# EAGLE board 4056 (EAGLE 8.7.1)
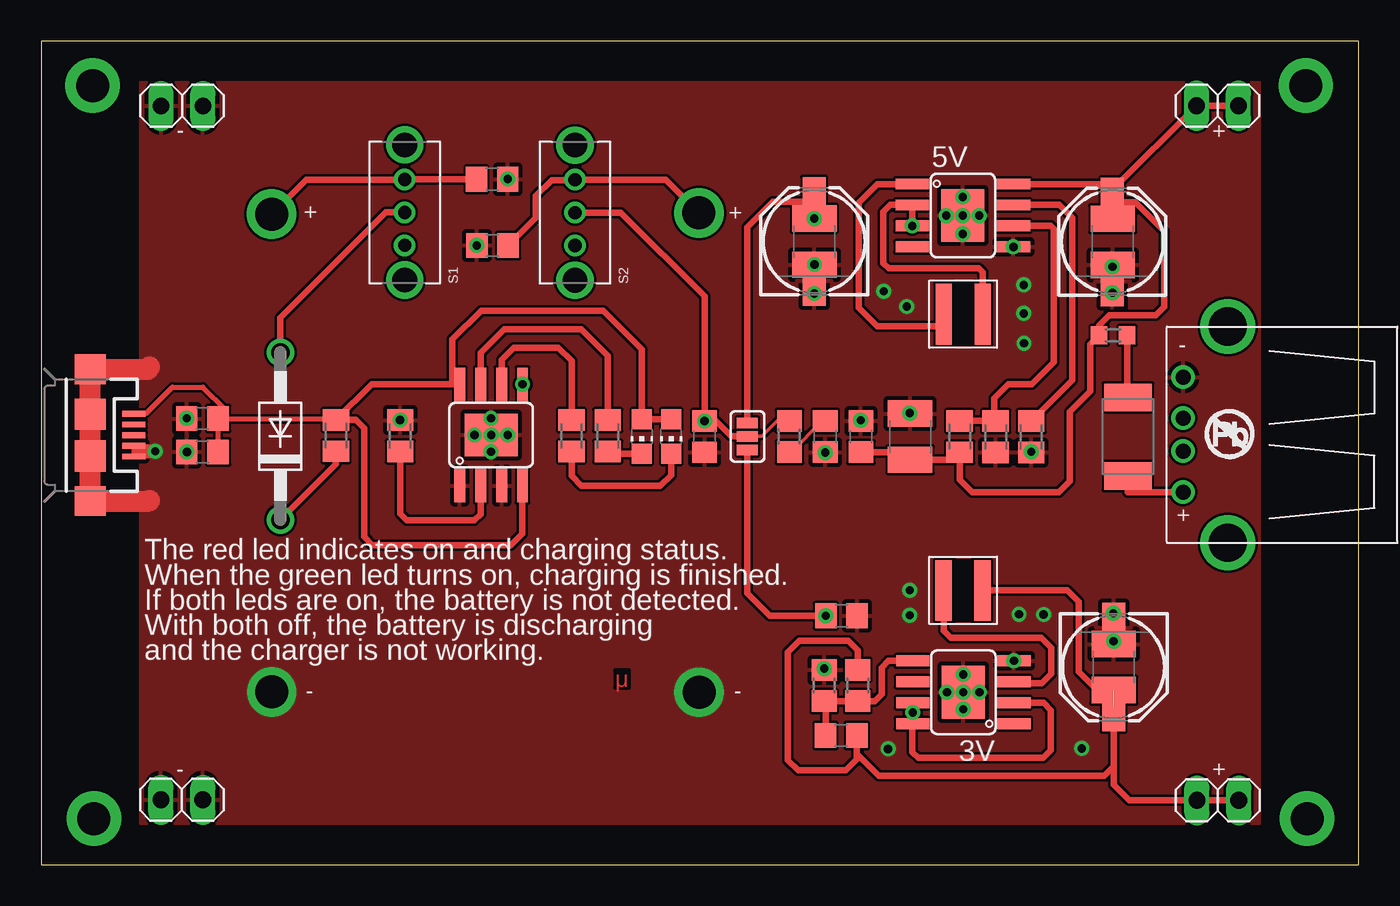
[diagram p0: board, top side]
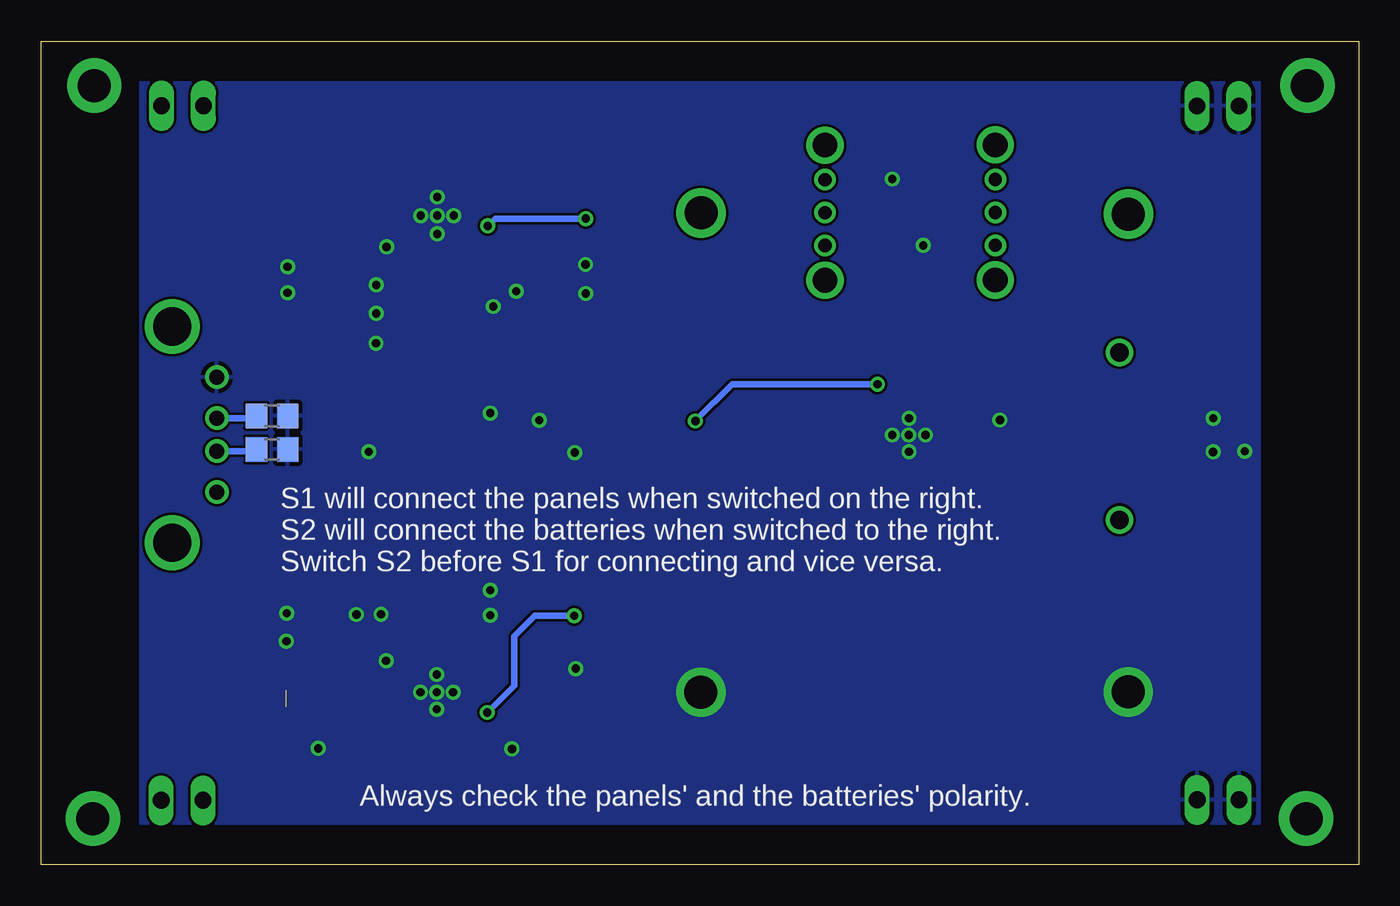
[diagram p1: board, bottom side, seen from below]

Size 80 x 50 mm. Coordinates in mm from the lower left corner, seen from the top.
Outline: 0,0 80,0 80,50 0,50 0,0
Copper layers (1*16): Top 0.035mm / dielectric 1.5mm / Bottom 0.035mm
Design rules "default": minimum track width 6mil, minimum drill 0.35mm, track to track 6mil, track to pad 6mil, pad to pad 6mil, via to via 6mil, smd to smd 6mil, copper to edge 40mil, drill to drill 6mil, minimum pad ring 10mil, minimum via ring 8mil, stop-mask expansion 4mil, vias tented up to drill 0mil, thermal gap 10mil

## Footprints (pad centres in the part's own frame; a part is rotated, then mirrored left to right if it is on the bottom)
SO8_EP = smd 0.66 x 2.032: EN -0.635,3.073; FB 1.905,3.073; GND1 1.905,-3.073; IN -0.635,-3.073; LX 0.635,-3.073; NC -1.905,-3.073; NC1 0.635,3.073; PG -1.905,3.073 | smd 3.2 x 2.6: GND 0,0
SOP-8LEP = smd 0.66 x 2.032: 1 -1.905,-3.073; 2 -0.635,-3.073; 3 0.635,-3.073; 4 1.905,-3.073; 5 1.905,3.073; 6 0.635,3.073; 7 -0.635,3.073; 8 -1.905,3.073 | smd 3.2 x 2.6: 9 0,0
C0805 = smd 1.3 x 1.5: 1 -0.95,0; 2 0.95,0
C1210 = smd 1.6 x 2.7: 1 -1.4,0; 2 1.4,0
PANASONIC_D = smd 3 x 1.4: + 2.4,0; - -2.4,0
DO41-10 = drill 1.118: A 5.08,0; C -5.08,0
R0603 = smd 1 x 1.1: 1 -0.85,0; 2 0.85,0
1812 = smd 1.676 x 2.896: 1 -2.388,0; 2 2.388,0
1X02 = drill 1.016 long: 1 -1.27,0; 2 1.27,0
1X01_2MM = drill 2 pad 3.302: 1 0,0
USB-MICROB = smd 1.4 x 0.35: D+ -2.65,0; D- -2.65,-0.65; GND -2.65,1.3; ID -2.65,0.65; VBUS -2.65,-1.3 | smd 1.9 x 1.8: MT1 0,-4; MT2 0,4 | smd 1.9 x 1.9: P$1 0,-1.27; P$2 0,1.27
SMT-JUMPER_3_NO_SILK = smd 0.635 x 1.27: 1 -0.813,0; 2 0,0; 3 0.813,0
WE-MAPI_40XX = smd 0.98 x 3.7: 1 -1.185,0; 2 1.185,0
CHIP-LED0805 = smd 1.2 x 1.2: A 0,-1.05; C 0,1.05
R0805 = smd 1.3 x 1.5: 1 -0.95,0; 2 0.95,0
M0805 = smd 1.3 x 1.6: 1 -0.95,0; 2 0.95,0
SW2MM = drill 0.8: 1 -2,0; 2 0,0; 3 2,0 | drill 1.5 pad 1.676: P$1 -4.1,0; P$2 4.1,0
ESOP8 = smd 0.66 x 2.032: 1 -1.905,-3.073; 2 -0.635,-3.073; 3 0.635,-3.073; 4 1.905,-3.073; 5 1.905,3.073; 6 0.635,3.073; 7 -0.635,3.073; 8 -1.905,3.073 | smd 3.2 x 2.6: 9 0,0
USB-A-H = drill 0.914: D+ 2.718,-1.003; D- 2.718,1.003; GND 2.718,-3.493; VBUS 2.718,3.493 | drill 2.311: P$5 0,-6.566; P$6 0,6.566

## Placement (x,y rotation side)
3V  SY8083P  [SO8_EP]  55.99,10.47 90 top
5V  FP6276A  [SOP-8LEP]  55.96,39.42 270 top
C1  [C0805]  9.79,27.09 180 top
C2  [C0805]  40.28,25.99 270 top
C3  [C0805]  9.79,25.06 180 top
C4  [C1210]  52.76,25.99 90 top
C5  [C0805]  49.77,26 270 top
C6  [C0805]  48.57,7.85 180 top
C7  [C1210]  65.12,12 90 top
C8  4.7-10u  [C0805]  48.59,15.11 0 top
C9  47uF  [PANASONIC_D]  65.11,12 270 top
C10  47uF  [PANASONIC_D]  65.04,37.82 90 top
C11  47uF  [PANASONIC_D]  46.93,37.84 90 top
C12  [C1210]  65.06,37.82 270 top
C13  [C1210]  46.94,37.83 270 top
C14  100  [C0805]  27.38,41.62 0 top
C15  22n  [C0805]  47.6,26 270 top
C16  100  [C0805]  27.4,37.6 180 top
DIN  SB120  [DO41-10]  14.52,26.02 90 top
F  [R0603]  65.08,32.14 180 top
F1  16V/2.5A(5A TRIP)  [1812]  65.99,25.99 270 top
GND  [1X02]  8.55,46.07 0 top
J1  [1X01_2MM]  76.86,2.8 0 top
J2  [1X01_2MM]  76.78,47.3 0 top
J3  [1X01_2MM]  3.2,2.8 0 top
J4  [1X01_2MM]  3.12,47.3 0 top
J5  [USB-MICROB]  2.98,26.08 180 top
JP1  [1X02]  71.44,3.91 0 top
JP2  [1X02]  8.54,3.94 0 top
JP3  JUMPER-SMT_3_NO_SILK  [SMT-JUMPER_3_NO_SILK]  42.88,26 270 top
L1  2.2u  [WE-MAPI_40XX]  55.98,33.43 180 top
L4  2.2u  [WE-MAPI_40XX]  55.97,16.65 0 top
LED1  [CHIP-LED0805]  36.47,26 180 top
LED2  [CHIP-LED0805]  38.25,26 180 top
PLACEHOLDER2  [1X02]  71.42,46.08 0 top
R1  (549)-560  [R0805]  49.58,10.88 90 top
R2  121-(124)  [R0805]  47.55,10.88 270 top
R3  [R0805]  65.98,27.25 180 bottom
R4  4k  [M0805]  21.8,26.04 270 top
R5  2k  [M0805]  34.4,26.04 90 top
R6  2k  [M0805]  32.2,26.04 90 top
R7  0  [M0805]  17.9,26.05 270 top
R8  330k  [M0805]  60.11,25.98 270 top
R9  560  [M0805]  55.76,25.99 90 top
R10  75  [M0805]  57.95,25.98 270 top
R11  [R0805]  65.98,25.21 180 bottom
R12  0  [R0805]  45.43,26 90 top
S1  SWITCH  [SW2MM]  22.07,39.6 90 top
S2  SWITCH  [SW2MM]  32.41,39.59 90 top
SOLAR  4056  [ESOP8]  27.32,26.09 0 top
U$1  [NO_PB_LOGO_0.120]  70.43,24.25 0 top
X1  USB-A-H  [USB-A-H]  72.05,26.11 180 top

## Library data of the parts
3V = microcodes; SOIC8: soic8_ep
5V S1 S2 SOLAR = microcodes
C1-C8 C12-C16 = rcl; SPICEPREFIX: C
C9-C11 = SparkFun-Capacitors; PROD_ID: CAP-08478
DIN = diode
F R1-R12 = rcl; SPICEPREFIX: R
F1 = SparkFun-Fuses; PROD_ID: RES-14390
GND JP1 JP2 PLACEHOLDER2 = pinhead
J1-J4 = SparkFun-Connectors
J5 = SparkFun-Connectors; PROD_ID: CONN-09505; SF_ID: PRT-08533
JP3 = SparkFun-Jumpers
L1 L4 = PowerMagnetics (rev18e); WE-NUMBER: 74438356022/2,2uH
LED1 LED2 = led
U$1 = SparkFun-Aesthetics
X1 = con-usb

## Nets
2FB: 3V.FB C6.2 R1.1 R2.2
BAT: C2.1 JP3.2 R12.2 S2.2 SOLAR.5
BAT3: 3V.EN 3V.IN 3V.PG C8.1 JP3.3
BAT5: 5V.2 5V.3 C11.+ C13.1 JP3.1 L1.1
BH: C16.1 S2.3
CHRG: R5.2 SOLAR.7
CLED: LED1.C R5.1
DIN: DIN.A S1.2
DM: R11.2 X1.D-
DP: R3.2 X1.D+
FB5: 5V.6 R9.2 R10.1
GND: 3V.GND 3V.GND1 5V.5 5V.9 C1.2 C2.2 C3.2 C4.2 C5.1 C7.2 C8.2 C9.- C10.- C11.- C12.2 C13.2 C14.2 C15.2 C16.2 GND.1 GND.2 J5.GND J5.ID J5.MT1 J5.MT2 J5.P$1 J5.P$2 JP2.1 JP2.2 R2.1 R3.1 R4.1 R8.2 R10.2 R11.1 SOLAR.1 SOLAR.3 SOLAR.9 X1.GND
HOLD: C15.1 R12.1
LX: 3V.LX L4.1
LX5: 5V.1 L1.2
N$2: S2.1
N$4: S1.1
NC: 5V.4
OVC: 5V.7 R8.1
PNL: C14.1 S1.3
PROG: R4.2 SOLAR.2
SDDD: DIN.C R7.2
SIN: C1.1 C3.1 J5.VBUS LED1.A LED2.A R7.1 SOLAR.4 SOLAR.8
SLED: LED2.C R6.1
STB: R6.2 SOLAR.6
VFF: F1.1 F.1
VOUT5: 5V.8 C4.1 C5.2 C10.+ C12.1 F.2 PLACEHOLDER2.1 PLACEHOLDER2.2 R9.1
VOUT33: C6.1 C7.1 C9.+ JP1.1 JP1.2 L4.2 R1.2
VUSB: F1.2 X1.VBUS

## Tracks (layer width: path | path; a pad name or v marks a point on that pad's centre or on a via)
2FB
  Top 0.406: C6.2 47.62,9.86 R2.2 R1.1 50.6,9.93 51.02,10.35 51.02,11.97 51.42,12.38 3V.FB
BAT  (via drill 0.5)
  Top 0.203: JP3.2 43.74,26 44.69,26.95 R12.2
  Top 0.406: JP3.2 41.9,26 40.96,26.94 C2.1 40.28,34.51 35.2,39.59 S2.2
  Bottom 0.406: SOLAR.5 38.06,29.16 C2.1
  other vias: 29.23,29.16 40.28,26.94
BAT3  (via drill 0.5)
  Top 0.406: 3V.IN 60.87,9.84 61.31,9.39 61.31,6.95 60.85,6.49 53.25,6.49 52.9,6.84 52.9,8.27 | 52.9,8.27 52.9,8.55 3V.PG | 3V.EN v52.92,9.24 52.92,8.29 52.9,8.27 | JP3.3 42.88,16.48 44.25,15.11 C8.1
  Bottom 0.406: v52.92,9.24 51.29,10.87 51.29,13.86 50.04,15.11 C8.1
  other vias: 47.64,15.11
BAT5  (via drill 0.5)
  Top 0.406: JP3.1 42.88,38.71 44.41,40.24 C11.+ C13.1 | L1.1 57.16,35.97 56.93,36.2 51.46,36.2 51.13,36.53 51.13,39.64 51.55,40.05 5V.2 v52.89,38.78
  Bottom 0.406: C13.1 52.44,39.23 v52.89,38.78
  other vias: 46.94,39.23
BH  (via drill 2)
  Top 0.406: v39.93,39.57 37.91,41.59 S2.3 32.39,41.57 30.99,41.57 30.03,40.61 30.03,39.28 C16.1
CHRG
  Top 0.406: R5.2 34.4,30.9 32.8,32.5 28.1,32.5 26.68,31.09 SOLAR.7
CLED
  Top 0.406: R5.1 34.54,24.95 LED1.C
DIN
  Top 0.406: S1.2 20.92,39.6 14.52,33.2 DIN.A
DM
  Bottom 0.406: X1.D- 67.03,25.11 R11.2
DP
  Bottom 0.406: X1.D+ 67.07,27.11 R3.2
FB5
  Top 0.406: R9.2 57.87,26.94 | 57.87,26.94 R10.1 | 5V.6 61.3,38.78 61.49,38.6 61.49,30.52 60.14,29.17 58.72,29.17 57.87,28.32 57.87,26.94
GND  (via drill 0.5, 2)
  Top 0.305: J5.ID J5.GND
  Top 0.813: v6.93,25.11 6.13,25.11 6.11,25.09
  Top 1.27: 6.59,30.21 6.46,30.08 J5.MT1 J5.P$1 J5.P$2 J5.MT2 6.56,22.08 6.59,22.11
  other vias: 14,10.49 55.98,10.47 39.95,10.47 56.97,10.47 55.98,11.55 54.99,10.47 55.98,9.44 59.06,12.39 65.11,13.56 65.09,15.26 51.42,7.03 63.17,7.06 52.55,33.89 51.15,34.81 46.95,36.44 46.93,34.68 65.04,36.3 65.04,34.72 60.11,25.07 59.03,37.51 54.95,39.41 55.95,38.3 56.96,39.41 55.95,40.54 55.96,39.41 59.65,35.2 59.65,33.47 59.67,31.66 8.84,27.1 8.85,25.06 52.74,27.42 49.76,26.99 47.61,25.02 27.32,26.09 21.79,27 27.31,27.11 26.31,26.09 28.32,26.09 27.31,25.07 47.54,11.91 28.32,41.63 26.44,37.6 52.73,16.67 52.73,15.14 60.86,15.19 59.37,15.21
  pour Top: 6,47.5 6,2.5 74,2.5 74,47.5
  pour Bottom: 6,47.5 6,2.5 74,2.5 74,47.5
HOLD
  Top 0.203: C15.1 47.43,26.95 45.53,25.05 R12.1
LX
  Top 0.406: L4.1 54.78,14.21 55.23,13.77 60.72,13.77 61.32,13.17 61.32,11.59 60.76,11.03 58.47,11.03 58.55,11.11 3V.LX
LX5
  Top 0.406: 5V.1 50.77,41.33 49.63,40.18 49.63,33.82 50.77,32.68 54.92,32.68 54.92,33.3 L1.2
N$3
  pour Top: 33.98,12.66 33.98,10.2 34.1,10.08 35.87,10.08 36.02,10.23 36.02,12.61 35.88,12.75 34.04,12.75 34.01,12.72
OVC
  Top 0.406: R8.1 62.6,29.42 62.6,39.28 61.83,40.05 5V.7
PNL  (via drill 2)
  Top 0.406: v13.99,39.5 16.09,41.6 S1.3 22.09,41.62 C14.1
PROG
  Top 0.406: SOLAR.2 26.68,21.29 26.3,20.9 22.2,20.9 21.8,21.3 R4.2
SDDD
  Top 0.406: DIN.C 17.9,24.32 R7.2
SIN
  Top 0.305: C1.1 11.04,26.79 11.17,26.79 11.17,27.64 9.81,29 7.96,29 6.34,27.38 J5.VBUS | C3.1 C1.1 | C1.1 17.81,27.09 R7.1
  Top 0.406: 24.96,29.16 20.06,29.16 R7.1 19.1,27 19.6,26.5 19.6,19.9 20.1,19.4 28.5,19.4 29.2,20.1 29.2,22.99 SOLAR.4 | 24.96,29.16 SOLAR.8 | LED2.A LED1.A 36.47,31.3 34.13,33.64 26.71,33.64 24.96,31.89 24.96,29.16
SLED
  Top 0.406: LED2.C 38.25,23.65 37.6,23 32.8,23 32.2,23.6 R6.1
STB
  Top 0.406: R6.2 32.2,30.6 31.4,31.4 28.7,31.4 27.95,30.66 SOLAR.6
VFF
  Top 0.152: 65.42,28.36 65.44,28.38 F1.1
  Top 0.406: F.1 65.93,28.44 F1.1
VOUT5
  Top 0.406: R9.1 55.76,25.02 | 55.76,25.02 55.76,23.38 56.52,22.62 61.79,22.62 62.45,23.28 62.45,27.5 63.7,28.75 63.7,31.61 F.2 64.23,32.74 64.86,33.37 67.68,33.37 68.18,33.87 68.18,38.46 66.42,40.22 C10.+ 65.04,40.52 | 65.04,40.52 65.23,40.71 | 65.23,40.71 65.23,40.36 | 65.23,40.36 65.23,39.39 C12.1 | 65.04,40.55 65.23,40.36 | 5V.8 64.61,41.33 65.23,40.71 | PLACEHOLDER2.2 PLACEHOLDER2.1 65.04,40.97 65.04,40.52 | C5.2 52.3,25.05 C4.1 55.33,24.59 55.76,25.02
VOUT33  (1 unrouted)
  Top 0.406: C9.+ 63.01,11.7 63.01,15.95 62.31,16.65 L4.2 | 49.52,6.75 49.52,6.41 48.84,5.73 45.96,5.73 45.34,6.35 45.34,12.9 46.03,13.59 49.01,13.59 49.58,13.02 R1.2 | 49.52,6.75 C6.1 | 49.52,6.75 50.86,5.41 64.55,5.41 65.11,5.97 C9.+ | JP1.2 JP1.1 66.05,3.91 65.11,4.85 C9.+
VUSB
  Top 0.406: F1.2 65.98,22.62 X1.VBUS

## Text on the board
Top: μ
tNames: - | + | + | + | - | + | The red led indicates on and charging status. / When the green led turns on, charging is finished. / If both leds are on, the battery is not detected. / With both off, the battery is discharging / and the charger is not working. | - | - | - | +
bNames: S1 will connect the panels when switched on the right. / S2 will connect the batteries when switched to the right. / Switch S2 before S1 for connecting and vice versa. | Always check the panels' and the batteries' polarity.